# EAGLE board BrakeStrobeLightsI1 (EAGLE 8.0.1)
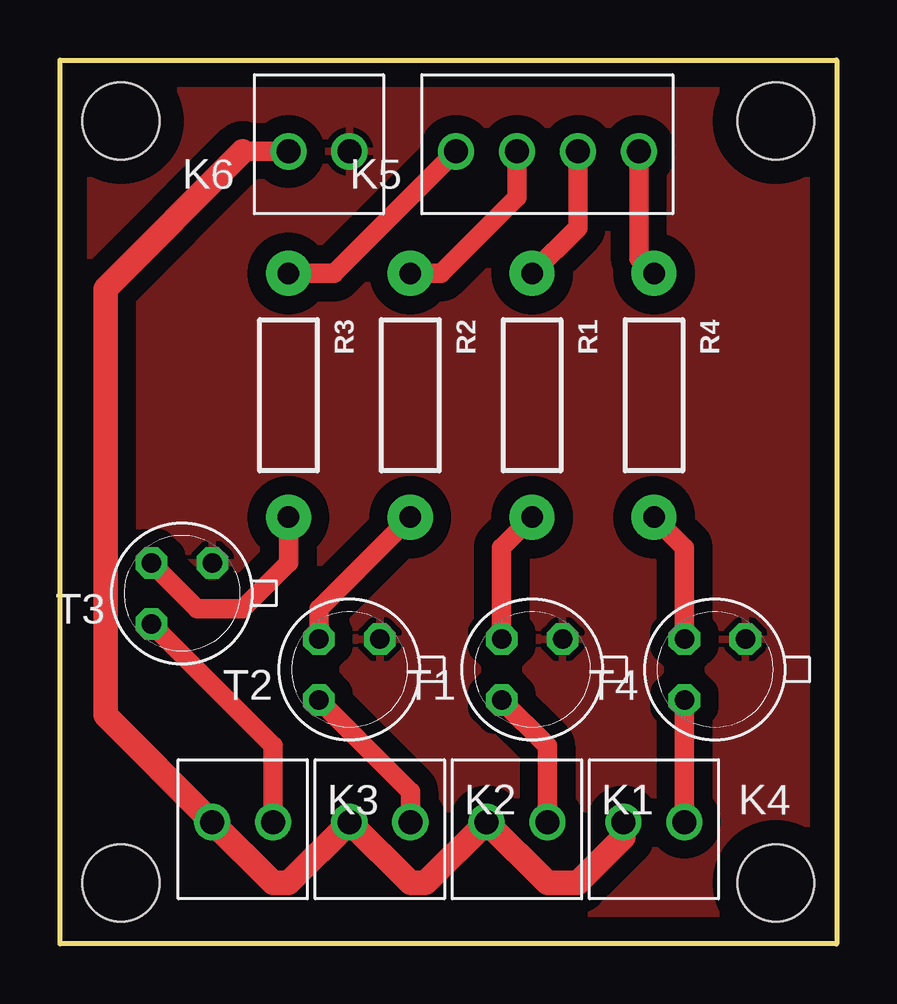
[diagram p0: board, top side]

Size 32.38 x 36.83 mm. Coordinates in mm from the lower left corner, seen from the top.
Outline: 0,0 0,36.83 32.38,36.83 32.38,0 0,0
Copper layers (1*16): Top 0.035mm / dielectric 1.5mm / Bottom 0.035mm
Design rules "default": minimum track width 10mil, minimum drill 24mil, track to track 8mil, track to pad 8mil, pad to pad 8mil, via to via 8mil, smd to smd 8mil, copper to edge 40mil, drill to drill 8mil, minimum pad ring 10mil, minimum via ring 8mil, stop-mask expansion 4mil, vias tented up to drill 0mil, thermal gap 10mil
Holes 3.2 mm at 29.84,2.54 2.54,2.54 2.54,34.29 29.84,34.29
tKeepout: area 0,36.8 to 32.4,38.1; area 32.4,-1.3 to 33.7,38.1; area 0,-1.3 to 32.4,0; area -1.3,-1.3 to 0,38.1

## Footprints (pad centres in the part's own frame; a part is rotated, then mirrored left to right if it is on the bottom)
61900211121 = drill 1: 1 1.27,0; 2 -1.27,0
61900411121 = drill 1: 1 1.27,0; 2 -1.27,0; 3 -3.81,0; 4 -6.35,0
AXIAL-0.4 = drill 0.9 pad 1.88: P$1 -5.08,0; P$2 5.08,0
TO18 = drill 0.813 octagon: 1 -1.27,-1.27; 2 1.27,-1.27; 3 1.27,1.27

## Placement (x,y rotation side)
K1  61900211121  [61900211121]  19.05,5.08 0 top
K2  61900211121  [61900211121]  13.34,5.08 0 top
K3  61900211121  [61900211121]  7.62,5.08 0 top
K4  61900211121  [61900211121]  24.77,5.08 0 top
K5  61900411121  [61900411121]  17.78,33.02 180 top
K6  61900211121  [61900211121]  10.79,33.02 180 top
R1  [AXIAL-0.4]  19.68,22.86 270 top
R2  [AXIAL-0.4]  14.61,22.86 270 top
R3  [AXIAL-0.4]  9.53,22.86 270 top
R4  [AXIAL-0.4]  24.77,22.86 270 top
T1  2N2222  [TO18]  19.68,11.43 180 top
T2  2N2222  [TO18]  12.06,11.43 180 top
T3  2N2222  [TO18]  5.08,14.61 180 top
T4  2N2222  [TO18]  27.3,11.43 180 top

## Library data of the parts
K1-K6 = Wurth_Elektronik_Electromechanic_Wire_to_Board_Connectors_rev15c
R1-R4 = SparkFun-Passives
T1-T4 = transistor

## Nets
ARDUINO_C: K5.2 R2.P$1
ARDUINO_L: K5.3 R1.P$1
ARDUINO_R: K5.1 R3.P$1
ARDUINO_S: K5.4 R4.P$1
C: K2.1 T2.3
GND: K6.2 T1.1 T2.1 T3.1 T4.1
L: K1.1 T1.3
N$1: R3.P$2 T3.2
N$2: R2.P$2 T2.2
N$3: R4.P$2 T4.2
N$4: R1.P$2 T1.2
R: K3.1 T3.3
S: K4.1 T4.3
VCC: K1.2 K2.2 K3.2 K4.2 K6.1

## Tracks (layer width: path | path; a pad name or v marks a point on that pad's centre or on a via)
ARDUINO_C
  Top 0.813: R2.P$1 15.88,27.94 19.05,31.11 K5.2
ARDUINO_L
  Top 0.813: R1.P$1 21.59,29.84 K5.3
ARDUINO_R
  Top 0.813: R3.P$1 11.43,27.94 K5.1
ARDUINO_S
  Top 0.813: R4.P$1 24.13,28.57 K5.4
C
  Top 0.813: T2.3 14.61,6.35 K2.1
GND
  pour Top (isolate 0.762): 0,0 0,36.83 32.38,36.83 32.38,0
L
  Top 0.813: T1.3 20.32,8.26 K1.1
N$1
  Top 0.813: R3.P$2 9.53,15.88 7.62,13.97 5.71,13.97 T3.2
N$2
  Top 0.813: R2.P$2 10.79,13.97 T2.2
N$3
  Top 0.813: R4.P$2 26.04,16.51 T4.2
N$4
  Top 0.813: R1.P$2 18.41,16.51 T1.2
R
  Top 0.813: T3.3 8.89,8.26 K3.1
S
  Top 0.813: T4.3 K4.1
VCC
  Top 0.813: K6.1 7.62,33.02
  Top 1.016: 7.62,33.02 1.91,27.3 1.91,9.53 K3.2 8.89,2.54 9.53,2.54 K2.2 14.61,2.54 15.24,2.54 K1.2 20.32,2.54 21.59,2.54 23.5,4.45 K4.2